# EAGLE board USB (EAGLE 7.4.0)
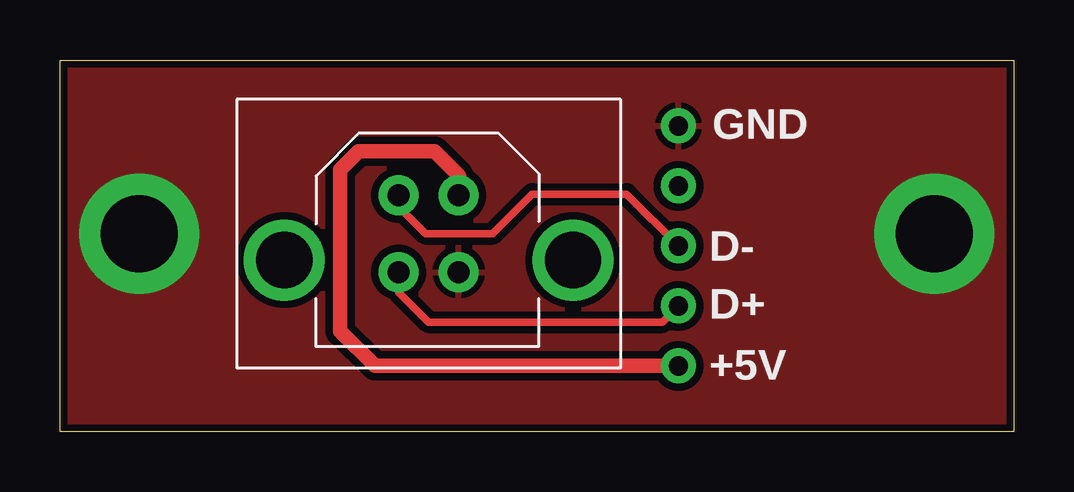
[diagram p0: board, top side]
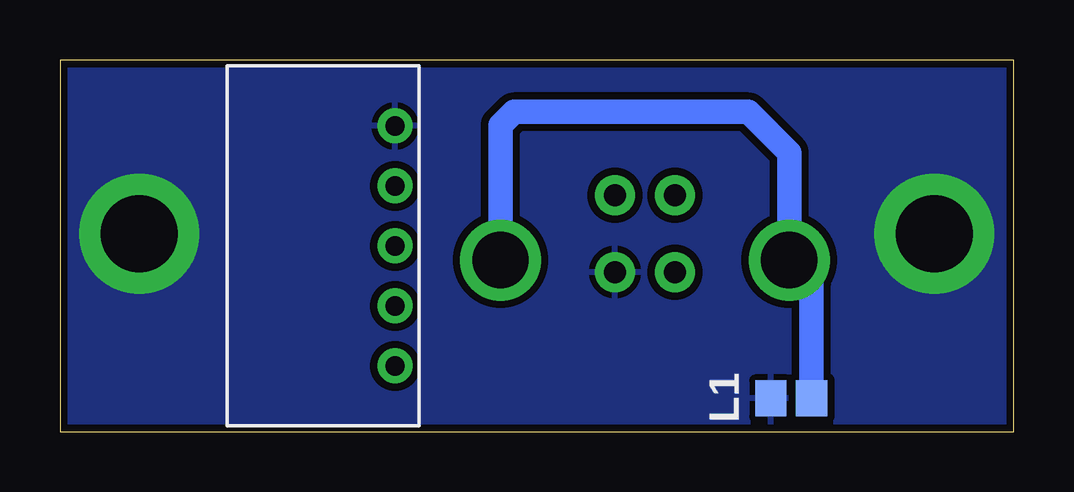
[diagram p1: board, bottom side, seen from below]

Size 39.75 x 15.49 mm. Coordinates in mm from the lower left corner, seen from the top.
Outline: 39.75,15.49 39.75,0 0,0 0,15.49 39.75,15.49
Copper layers (1*16): Top 0.035mm / dielectric 1.5mm / Bottom 0.035mm
Design rules "smiery": minimum track width 10mil, minimum drill 12mil, track to track 7mil, track to pad 5mil, pad to pad 5mil, via to via 6mil, smd to smd 0mil, copper to edge 12mil, drill to drill 10mil, minimum pad ring 13mil, minimum via ring 10mil, stop-mask expansion 2mil, vias tented up to drill 25mil, thermal gap 10mil

## Footprints (pad centres in the part's own frame; a part is rotated, then mirrored left to right if it is on the bottom)
USB-B-PTH-V = drill 0.914 pad 1.676: D+ -1.25,-1.6; D- -1.25,1.6; GND 1.25,-1.6; VBUS 1.25,1.6 | drill 2.35: S1 -6.02,-1.1; S2 6.02,-1.1
JST-XH-05P-H = drill 0.8: 1 -5,0; 2 -2.5,0; 3 0,0; 4 2.5,0; 5 5,0
L0805 = smd 1.3 x 1.5: 1 -0.85,0; 2 0.85,0

## Placement (x,y rotation side)
CONN1  USB-V  [USB-B-PTH-V]  15.37,8.26 0 top
CONN2  PINHD-1X05-JST-XH-H  [JST-XH-05P-H]  25.78,7.75 90 bottom
L1  FERRITE_BEAD-BLM21PG221SN1D  [L0805]  9.27,1.4 180 bottom

## Library data of the parts
CONN1 = igor_lbr; MANUFACTURER: CUI Devices; MPN: UJ2-BV-1-TH
CONN2 = igor_lbr
L1 = igor_lbr; MANUFACTURER: Murata; MPN: BLM21PG221SN1D

## Nets
+5V: CONN1.VBUS CONN2.1
D+: CONN1.D+ CONN2.2
D-: CONN1.D- CONN2.3
GND: CONN1.GND CONN2.5 L1.2
N$1: CONN1.S1 CONN1.S2 L1.1

## Tracks (layer width: path | path; a pad name or v marks a point on that pad's centre or on a via)
+5V
  Top 0.61: CONN2.1 13.13,2.75 11.68,4.19 11.68,10.92 12.45,11.68 15.62,11.68 16.64,10.67 16.64,9.88 CONN1.VBUS
D+
  Top 0.305: CONN1.D+ 14.12,5.82 15.37,4.57 25.11,4.57 CONN2.2
D-
  Top 0.305: CONN1.D- 14.12,9.38 15.24,8.26 18.03,8.26 19.68,9.91 23.62,9.91 CONN2.3
GND  (via drill 3.2 pad 5)
  other vias: 3.3,8.26 36.45,8.26
  pour Top (isolate 0.305): 0,15.49 0,0 39.75,0 39.75,15.49
  pour Bottom (isolate 0.305): 0,15.49 0,0 39.75,0 39.75,15.49
N$1
  Bottom 1.016: CONN1.S2 21.39,12.78 20.83,13.34 11.05,13.34 9.35,11.63 CONN1.S1 8.42,6.23 L1.1

## Text on the board
tNames: GND | D- | D+ | +5V